# Allegro board LAY-97013_A2.brd
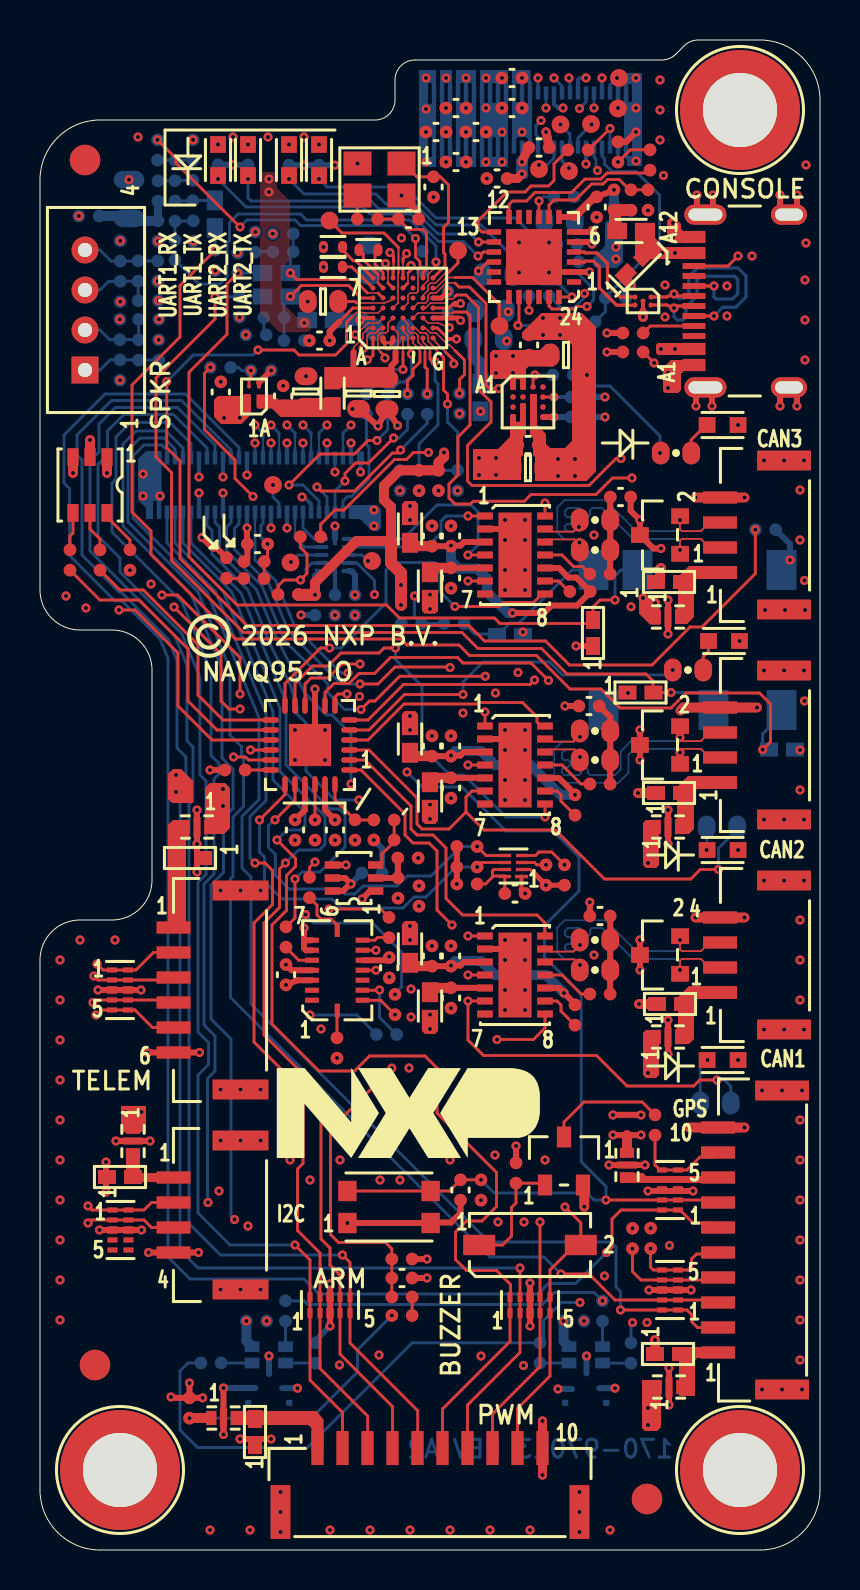
[diagram p0: board, top side]
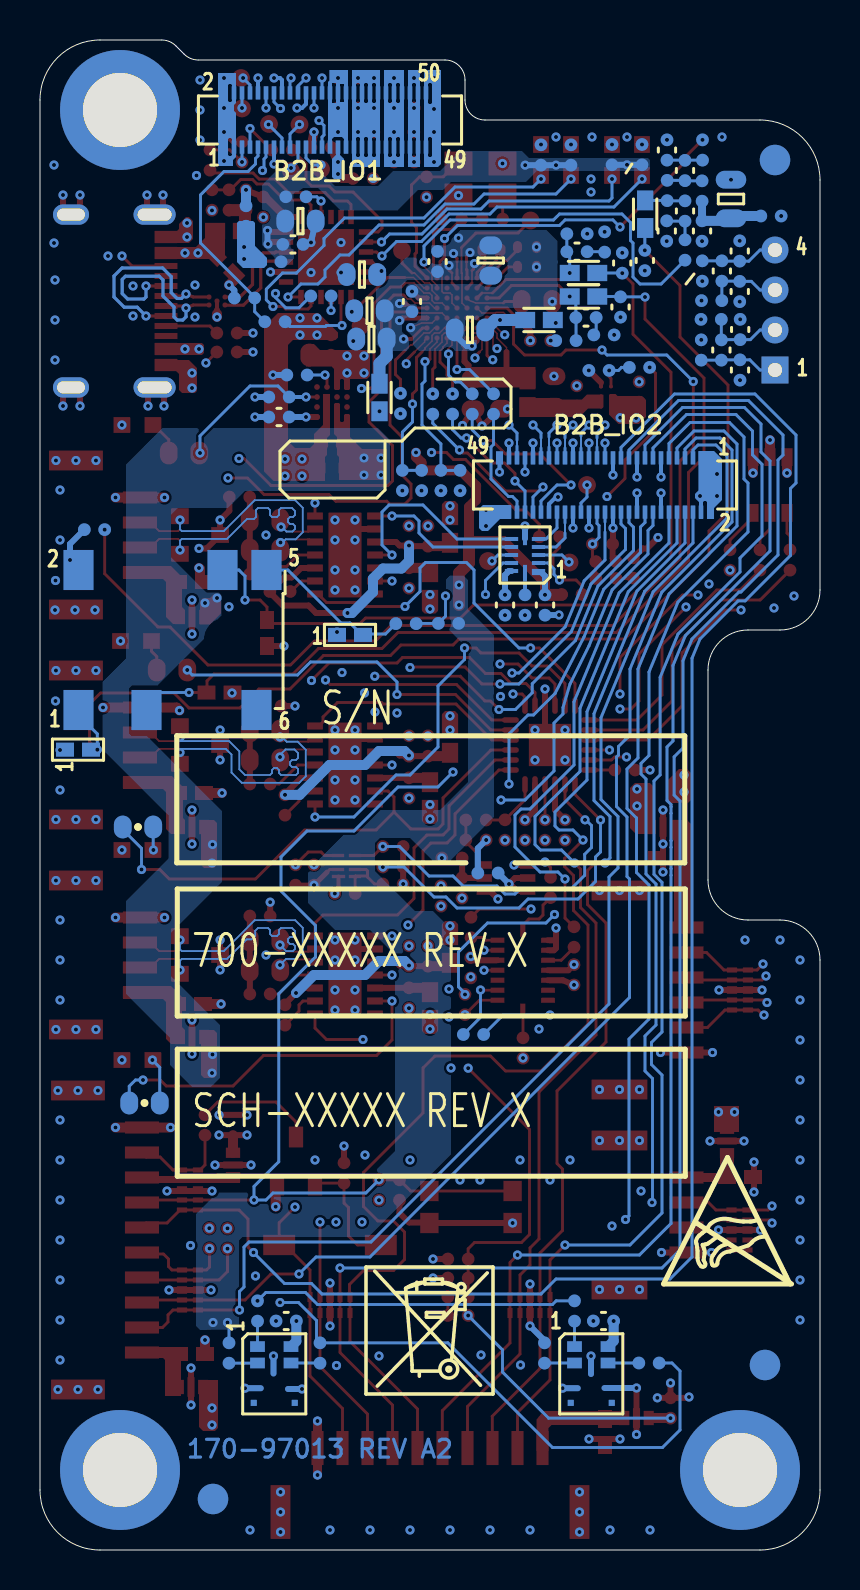
[diagram p1: board, bottom side, seen from below]

Outline 39 x 75.5 mm; copper layers: TOP, L2_GND1, L3_SIG1, L4_SIG2, L5_GND2, BOTTOM. Coordinates in mm from the lower left corner of the outline.
Outline path: 0,68.5 arc(0.88,70.62) 3,71.5 16.75,71.5 arc(17.46,71.79) 17.75,72.5 17.75,73.5 arc(18.04,74.21) 18.75,74.5 31.09,74.5 arc(31.47,74.58) 31.79,74.79 32.21,75.21 arc(32.53,75.42) 32.91,75.5 36,75.5 arc(38.12,74.62) 39,72.5 39,3 arc(38.12,0.88) 36,0 3,0 arc(0.88,0.88) 0,3 0,29.5 arc(0.59,30.91) 2,31.5 3.6,31.5 arc(5.01,32.09) 5.6,33.5 5.6,44 arc(5.01,45.41) 3.6,46 2,46 arc(0.59,46.59) 0,48 0,68.5

## Design rules (mm)
constraint set DEFAULT: min track width 0.145
net group CAN1_: nets CAN1_H CAN1_L
net group CAN2_: nets CAN2_H CAN2_L
net group CAN3_: nets CAN3_H CAN3_L
net group USB_CON_D: nets USB_CON_DM USB_CON_DP
net group USB_D: nets USB_DM USB_DP
net group CLK: nets CCM2_CLKO2_FLEXIO1_IO27 CCM_CLKO3_CAN3_TX CCM_CLKO4_CAN3_RX DEBUG_TCLK_SWCLK GPIO15_SPI8_SCK SAI2_TX_BCLK
net group I2C: nets I2C4_SCL I2C4_SDA I3C1_SCL I3C1_SDA I3C2A_SCL I3C2A_SDA
net group POWER: nets CON_CAN1_5V0 CON_CAN2_5V0 CON_CAN3_5V0 MICBIAS N20053822 N20058873 N20059703 N20163589 N20386625 N20387346 VBUS VDD_CAN1_3V3 VDD_CAN1_5V0 VDD_CAN2_3V3 VDD_CAN2_5V0 VDD_CAN3_3V3 VDD_CAN3_5V0 VDD_CON_GPS_3V3 VDD_CON_GPS_5V0 VDD_CON_I2C_5V0 VDD_CON_PWM VDD_CON_UART_5V0

## Placement (name value [footprint] x y rotation side)
BH1  MH3.7_6  [MH236-146P]  35 72 0 top
BH2  MH3.7_6  [MH236-146P]  4 4 0 top
BH3  MH3.7_6  [MH236-146P]  35 4 0 top
C1  0.1uF  [CC0402_25]  23.6 73.6 0 top
C2  0.1uF  [CC0402_25]  20.8 72.1 0 top
C3  0.1uF  [CC0402_25]  23.6 72.1 0 top
C4  0.1uF  [CC0402_25]  19.8 70.9 180 top
C5  1uF  [CC0402_25]  21.8 70.9 180 top
C6  1uF  [CC0402_25]  24.95 70.12 0 top
C7  1uF  [CC0402_25]  20.8 69.4 0 top
C8  0.1uF  [CC0402_25]  22.85 68.58 180 top
C9  10pF  [CC0402_25]  19.68 68.15 270 top
C10  1uF  [CC0402_25]  27.83 67.15 270 top
C11  10pF  [CC0402_25]  18.43 66.55 0 top
C12  2.2uF  [CC0402_TOL0P2_OV]  14.65 65.15 180 top
C13  2.2uF  [CC0402_TOL0P2_OV]  16.43 65 0 top
C14  2.2uF  [CC0402_TOL0P2_OV]  14.65 64.16 180 top
C15  4.7uF  [CC0603_OV]  14.15 62.42 180 top
C16  1uF  [CC0402_25]  13.97 60.47 180 top
C17  0.1uF  [CC0402_25]  24.45 60.25 90 top
C18  10uF  [CC0603_OV]  26.3 59.75 0 top
C19  4.7uF  [CC0603_OV]  13.3 57.92 90 top
C20  1uF  [CC0402_25]  9.04 57.9 90 top
C21  4.7uF  [CC0603_OV]  15.92 57.83 270 top
C22  4.7uF  [CC0603_OV]  17.35 57.8 270 top
C23  0.1uF  [CC0402_25]  12.16 57.7 90 top
C24  0.1uF  [CC0402_25]  24.4 55.25 0 top
C25  10uF  [CC0603_OV]  24.4 54.1 0 top
C26  4700pF  [CC0402_25]  29.02 52.65 0 top
C27  0.047uF  [CC0402_25]  19.6 50.7 90 top
C28  1uF  [CC0402_25]  20.55 50.7 90 top
C29  0.1uF  [CC0402_25]  10.88 50.3 180 top
C30  0.047uF  [CC0402_25]  20.55 48.6 270 top
C31  4700pF  [CC0402_25]  27.45 42.2 180 top
C32  0.047uF  [CC0402_25]  19.6 40.2 90 top
C33  1uF  [CC0402_25]  20.55 40.2 90 top
C34  0.047uF  [CC0402_25]  20.55 38.1 270 top
C35  0.1uF  [CC0402_25]  12.75 36 270 top
C36  0.1uF  [CC0402_25]  14.75 36 270 top
C37  0.1uF  [CC0402_25]  23.75 32.83 0 top
C38  4700pF  [CC0402_25]  28 31.7 180 top
C39  0.047uF  [CC0402_25]  19.6 29.7 90 top
C40  1uF  [CC0402_25]  20.55 29.7 90 top
C41  0.1uF  [CC0402_25]  17.46 29.11 270 top
C42  0.1uF  [CC0402_25]  12.3 28.76 90 top
C43  0.047uF  [CC0402_25]  20.55 27.6 270 top
C44  0.1uF  [CC0402_25]  21.02 18 90 top
C45  0.1uF  [CC0402_25]  18.1 13.6 0 top
C46  15pF  [CC0402_25]  7.65 70 90 bottom
C47  1uF  [CC0402_25]  6.75 68.97 270 bottom
C48  22uF  [CC0805_OV]  4.45 67.55 90 bottom
C49  1uF  [CC0402_25]  6.75 66.95 90 bottom
C50  4.7uF  [CC0603_OV]  25.98 66.44 180 bottom
C51  15pF  [CC0402_25]  7.66 65.95 90 bottom
C52  1uF  [CC0402_25]  5.9 65.95 270 bottom
C53  0.1uF  [CC0402_25]  26.35 65.28 180 bottom
C54  15pF  [CC0402_25]  4.01 64.95 270 bottom
C55  0.1uF  [CC0402_25]  12.15 64.91 180 bottom
C56  4.7uF  [CC0603_OV]  16.46 64.47 90 bottom
C57  15pF  [CC0402_25]  8.76 64.47 270 bottom
C58  0.1uF  [CC0402_25]  19.12 64.42 90 bottom
C59  220pF  [CC0402_25]  9.89 64.35 90 bottom
C60  15pF  [CC0402_25]  4.91 63.95 90 bottom
C61  4.7uF  [CC0603_OV]  22.9 63.77 0 bottom
C62  15pF  [CC0402_25]  4.01 62.92 270 bottom
C63  0.1uF  [CC0402_25]  20.4 62.42 90 bottom
C64  220pF  [CC0402_25]  9.97 62.15 270 bottom
C65  4.7uF  [CC0603_OV]  22.52 61.96 0 bottom
C66  0.1uF  [CC0402_25]  11.7 61.62 180 bottom
C67  15pF  [CC0402_25]  3.99 61.02 270 bottom
C68  4.7uF  [CC0603_OV]  17.5 61 0 bottom
C69  4.7uF  [CC0603_OV]  22.43 60.55 0 bottom
C70  15pF  [CC0402_25]  4.93 60 90 bottom
C71  15pF  [CC0402_25]  4 59 270 bottom
C72  1000pF  [CC0402_25]  27.05 56.65 0 bottom
C73  0.1uF  [CC0402_25]  15.75 47.25 270 bottom
C74  0.1uF  [CC0402_25]  13.75 47.25 270 bottom
C75  0.1uF  [CC0402_25]  26.69 11.45 0 bottom
C76  0.1uF  [CC0402_25]  10.82 11.45 0 bottom
D1  LED_AMB  [LED_0603]  8.9 69.5 270 top
D2  LED_GRN  [LED_0603]  10.4 69.5 270 top
D3  LED_AMB  [LED_0603]  12.45 69.5 270 top
D4  LED_GRN  [LED_0603]  13.95 69.5 270 top
D5  PESD0402  [0402_MLP#2]  29.75 64.25 45 top
D6  LED_SUPER_RED  [LED_0603]  34.13 56.25 0 top
D7  150352M173300  [LED6_0P85_3P25X2P85_SM]  2.5 53.25 270 top
D8  PESD0402  [0402_MLP]  31.45 48.4 0 top
D9  PESD0402  [0402_MLP]  27.65 45.85 90 top
D10  LED_GRN  [LED_0603]  34.2 45.45 0 top
D11  PESD0402  [0402_MLP]  30.02 42.87 0 top
D12  PESD0402  [0402_MLP]  31.45 37.85 0 top
D13  LED_GRN  [LED_0603]  34.13 35 0 top
D14  PESD0402  [0402_MLP]  7.5 34.6 180 top
D15  SZESD7104MUTAG  [UDFN10_2P5X1]  4 28 0 top
D16  PESD0402  [0402_MLP]  31.5 27.3 0 top
D17  LED_GRN  [LED_0603]  34.13 24.5 0 top
D18  PESD0402  [0402_MLP]  4 18.65 0 top
D19  SZESD7104MUTAG  [UDFN10_2P5X1]  31.5 18 180 top
D20  SZESD7104MUTAG  [UDFN10_2P5X1]  4.03 16 0 top
D21  SZESD7104MUTAG  [UDFN10_2P5X1]  31.5 13 180 top
D22  SZESD7104MUTAG  [UDFN10_2P5X1]  14.5 12.25 90 top
D23  SZESD7104MUTAG  [UDFN10_2P5X1]  24.5 12.25 90 top
D24  PESD0402  [0402_MLP]  31.4 9.8 0 top
D25  PESD0402  [0402_MLP]  10.75 5.9 90 top
D26  PESD0402  [0402_MLP]  23.5 45.75 180 bottom
D27  PESD0402  [0402_MLP]  37.1 40.02 180 bottom
FL1  0.1uF  [CC_FIL_0402]  31.4 46.65 0 top
FL2  0.1uF  [CC_FIL_0402]  7.85 36.15 180 top
FL3  0.1uF  [CC_FIL_0402]  31.4 36.15 0 top
FL4  0.1uF  [CC_FIL_0402]  31.4 25.65 0 top
FL5  0.1uF  [CC_FIL_0402]  4.65 20.45 270 top
FL6  0.1uF  [CC_FIL_0402]  29.35 19.25 270 top
FL7  0.1uF  [CC_FIL_0402]  31.45 8.15 0 top
FL8  0.1uF  [CC_FIL_0402]  9.18 6.6 0 top
J1  USB_TYPE_C  [CON16F_USB_TYPE-C_RA_SM]  36.3 62.45 90 top
J2  CON 1X4 PLUG  [CON_PH_4M_2MM_TH]  2.25 59 90 top
J3  CON_1X4  [CON_1X4_1P25_8P25X4P25_SM_RA]  36.25 50.75 90 top
J4  CON_1X4  [CON_1X4_1P25_8P25X4P25_SM_RA]  36.25 40.25 90 top
J5  CON_1X4  [CON_1X4_1P25_8P25X4P25_SM_RA]  36.25 29.75 90 top
J6  CON_1X6  [CON_1X6_1P25_10P75X4P25_SM]  9 28 90 top
J7  CON_1X4  [CON_1X4_1P25_8P25X4P25_SM]  9 16.75 90 top
J8  CON 1X10 SM  [CON10_1P25_15P75X4P05_SM]  35.75 15.5 90 top
J9  CON 1X10 SM  [CON10_1P25_15P75X4P05_SM]  19.5 3.25 0 top
J12  CONN AUDIO 6  [CON6P_JACK_SMT]  34.17 45.5 180 bottom
L1  120OHM@100MHZ  [IND_0603]  29.55 65.95 180 top
L2  120OHM@100MHZ  [IND_0603]  14.63 57.84 90 top
L3  BLM18KG121TZ1  [IND_0603]  18.5 51.05 270 top
L4  BLM18KG121TZ1  [IND_0603]  19.5 48.2 90 top
L5  BLM18KG121TZ1  [IND_0603]  18.5 40.55 270 top
L6  BLM18KG121TZ1  [IND_0603]  19.5 37.7 90 top
L7  BLM18KG121TZ1  [IND_0603]  18.5 30.05 270 top
L8  BLM18KG121TZ1  [IND_0603]  19.5 27.2 90 top
L9  120OHM@100MHZ  [IND_0603]  8.74 66.79 270 bottom
L10  120OHM@100MHZ  [IND_0603]  11.82 63.85 180 bottom
L11  120OHM@100MHZ  [IND_0603]  11.82 62.67 180 bottom
L12  120OHM@100MHZ  [IND_0603]  14.05 61.5 0 bottom
L13  120OHM@100MHZ  [IND_0603]  22.02 57.62 90 bottom
NOREF  -  []  38.3 25.6 0 top
NOREF#2  -  []  38.15 7.62 90 top
NOREF#3  -  []  6.68 17.38 90 top
NOREF#4  -  []  14.07 50.55 0 top
NOREF#5  -  []  25.25 47.8 90 top
NOREF#6  -  []  30.84 8.15 0 top
NOREF#7  -  []  11.85 19.6 0 top
NOREF#8  -  []  19.23 70.14 90 top
NOREF#9  -  []  25.25 28.75 90 top
NOREF#10  -  []  15.55 42.3 90 top
NOREF#11  -  []  25.15 56.65 90 top
NOREF#12  -  []  22.25 37.3 0 top
NOREF#13  -  []  4.29 21.06 90 top
NOREF#14  -  []  10.04 6.98 0 top
NOREF#15  -  []  34 48.88 90 top
NOREF#16  -  []  6.68 14.88 0 top
NOREF#17  -  []  10.03 23.02 90 top
NOREF#18  -  []  46.6 25.6 90 top
NOREF#19  -  []  13.6 30.49 0 top
NOREF#20  -  []  46.6 46.6 90 top
NOREF#21  -  []  11.15 22.6 0 top
NOREF#22  -  []  34 27.88 90 top
NOREF#23  -  []  16.02 51.9 90 top
NOREF#24  -  []  17.15 50.17 90 top
NOREF#25  -  []  37.86 4.9 0 top
NOREF#26  -  []  27.29 8.1 90 top
NOREF#27  -  [unnamed#2]  2.25 69.5 0 top
NOREF#28  -  []  37.2 26.02 90 top
NOREF#29  -  []  30.84 8.15 0 top
NOREF#30  -  []  33.77 59.56 90 top
NOREF#31  -  []  30.15 62.45 90 top
NOREF#32  -  []  16.45 65.5 90 top
NOREF#33  -  []  25.25 26.8 90 top
NOREF#34  -  []  34 40.88 90 top
NOREF#35  -  []  6.68 18.62 90 top
NOREF#36  -  []  8.57 6.6 0 top
NOREF#37  -  []  29.88 49 0 top
NOREF#38  -  []  14.18 65.15 0 top
NOREF#39  -  []  29.75 62.25 90 top
NOREF#40  -  []  15.25 64.51 0 top
NOREF#41  -  []  32.7 59.25 90 top
NOREF#42  -  []  38.3 46.6 0 top
NOREF#43  -  [unnamed#2]  2.75 9.25 0 top
NOREF#44  -  []  32.7 60.7 90 top
NOREF#45  -  []  19.53 16.35 90 top
NOREF#46  -  []  46.6 36.1 90 top
NOREF#47  -  []  21.96 15.25 0 top
NOREF#48  -  []  34 30.38 90 top
NOREF#49  -  []  19.23 70.14 0 top
NOREF#50  -  []  34 51.38 90 top
NOREF#51  -  []  16.41 31.29 90 top
NOREF#52  -  []  38.3 36.1 0 top
NOREF#53  -  []  25.25 37.3 90 top
NOREF#54  -  []  15.43 48.95 90 top
NOREF#55  -  []  39.33 42.25 90 top
NOREF#56  -  []  37.86 72.9 0 top
NOREF#57  -  []  29.54 62.86 0 top
NOREF#58  -  []  6.68 31.12 90 top
NOREF#59  -  []  23.25 34.73 0 top
NOREF#60  -  []  10.45 57.17 90 top
NOREF#61  -  []  13.85 50.8 0 top
NOREF#62  -  []  6.68 29.88 90 top
NOREF#63  -  []  8.45 45.67 0 top
NOREF#64  -  []  32.7 60.05 90 top
NOREF#65  -  []  37.2 36.52 90 top
NOREF#66  -  []  22.2 36.95 0 top
NOREF#67  -  []  25.3 36.95 90 top
NOREF#68  -  []  29.35 18.64 90 top
NOREF#69  -  []  7.24 36.15 0 top
NOREF#70  -  []  19.7 70.14 0 top
NOREF#71  -  []  27.02 48.75 0 top
NOREF#72  -  []  4.65 20.45 90 top
NOREF#73  -  []  26.45 9.35 0 top
NOREF#74  -  []  10.25 58.37 0 top
NOREF#75  -  []  34 38.38 90 top
NOREF#76  -  []  -72.88 -48.4 0 top
NOREF#77  -  []  30.79 46.29 90 top
NOREF#78  -  []  34 38.38 0 top
NOREF#79  -  []  21.95 22.6 90 top
NOREF#80  -  []  25.25 39.25 90 top
NOREF#81  -  []  14.25 42.23 0 top
NOREF#82  -  []  32.7 62.2 90 top
NOREF#83  -  []  23.65 56.65 0 top
NOREF#84  -  []  0.55 66.95 0 top
NOREF#85  -  []  25.3 26.45 90 top
NOREF#86  -  []  23.18 33.52 90 top
NOREF#87  -  []  6.68 24.88 0 top
NOREF#88  -  []  25.3 47.45 90 top
NOREF#89  -  []  11.44 8.1 90 top
NOREF#90  -  []  25.89 6.98 90 top
NOREF#91  -  []  11.62 -14.9 90 top
NOREF#92  -  []  30.9 70.47 0 top
NOREF#93  -  []  37.45 58.13 90 top
NOREF#94  -  []  23.18 34.88 0 top
NOREF#95  -  []  16.45 64.51 90 top
NOREF#96  -  []  11.81 33.99 90 top
NOREF#97  -  []  30.79 25.29 90 top
NOREF#98  -  []  32.7 61.2 90 top
NOREF#99  -  []  11.44 7.44 0 top
NOREF#100  -  []  27.29 7.44 0 top
NOREF#101  -  []  15.47 18.68 0 top
NOREF#102  -  []  1.65 51.85 0 top
NOREF#103  -  []  4.65 19.84 90 top
NOREF#104  -  []  37.2 47.02 90 top
NOREF#105  -  []  34 52.62 90 top
NOREF#106  -  []  43.7 70.47 90 top
NOREF#107  -  []  15.82 64.65 0 top
NOREF#108  -  []  14.86 26.98 90 top
NOREF#109  -  []  30.84 7.79 90 top
NOREF#110  -  []  10.25 56.98 90 top
NOREF#111  -  []  15.43 48.95 90 top
NOREF#112  -  []  5.47 54.6 0 top
NOREF#113  -  []  21.65 16.65 0 top
NOREF#114  -  [unnamed#2]  30.35 2.55 0 top
NOREF#115  -  []  6.86 4.9 0 top
NOREF#116  -  []  34 27.88 0 top
NOREF#117  -  []  15.37 17.95 0 top
NOREF#118  -  []  30.79 46.65 0 top
NOREF#119  -  []  26.45 9.35 90 top
NOREF#120  -  []  27.68 49 0 top
NOREF#121  -  []  1.08 51.62 90 top
NOREF#122  -  []  6.35 54.6 0 top
NOREF#123  -  []  34 42.12 90 top
NOREF#124  -  []  27.35 13.85 90 top
NOREF#125  -  []  29.54 62.86 90 top
NOREF#126  -  []  6.68 14.88 90 top
NOREF#127  -  []  22.25 47.8 0 top
NOREF#128  -  []  2.25 65 90 top
NOREF#129  -  []  19.43 15.62 90 top
NOREF#130  -  []  1.65 51.85 90 top
NOREF#131  -  []  15.55 38.2 0 top
NOREF#132  -  []  23.25 34.38 90 top
NOREF#133  -  []  14.18 64.16 0 top
NOREF#134  -  []  28.5 70.14 0 top
NOREF#135  -  []  13.6 30.49 0 top
NOREF#136  -  []  10.03 13.03 90 top
NOREF#137  -  []  4 4 0 top
NOREF#138  -  []  10.45 58.17 0 top
NOREF#139  -  []  28.32 48.75 0 top
NOREF#140  -  []  33.27 58.13 90 top
NOREF#141  -  []  2.25 59 90 top
NOREF#142  -  []  8.57 6.6 0 top
NOREF#143  -  []  19.45 12.6 90 top
NOREF#144  -  []  12.25 42.23 0 top
NOREF#145  -  []  6.68 24.88 90 top
NOREF#146  -  []  40.17 57.88 0 top
NOREF#147  -  []  5.05 57.05 90 top
NOREF#148  -  []  8.46 36.51 90 top
NOREF#149  -  []  33.27 66.77 0 top
NOREF#150  -  []  5.95 54.6 0 top
NOREF#151  -  []  15.95 65 0 top
NOREF#152  -  []  37.1 8.03 90 top
NOREF#153  -  []  7.85 36.15 0 top
NOREF#154  -  []  17.02 64.65 90 top
NOREF#155  -  []  25.25 49.75 90 top
NOREF#156  -  []  13.6 27.49 90 top
NOREF#157  -  []  4.35 50.17 0 top
NOREF#158  -  []  26.26 7.36 90 top
NOREF#159  -  []  25.15 56.65 90 top
NOREF#160  -  []  12.03 1.9 0 top
NOREF#161  -  []  11.62 0.85 0 top
NOREF#162  -  []  10.6 9.35 0 top
NOREF#163  -  []  34 31.62 90 top
NOREF#164  -  []  28.99 19.86 90 top
NOREF#165  -  []  22.2 47.45 0 top
NOREF#166  -  []  30.79 35.79 90 top
NOREF#167  -  []  38.15 7.62 0 top
NOREF#168  -  []  10.6 9.35 90 top
NOREF#169  -  []  34 48.88 0 top
NOREF#170  -  []  30.79 25.65 0 top
NOREF#171  -  []  10.41 7.36 90 top
NOREF#172  -  []  25.52 56.28 90 top
NOREF#173  -  []  23.25 33.67 0 top
NOREF#174  -  []  32.7 65.65 90 top
NOREF#175  -  []  10.04 6.98 90 top
NOREF#176  -  []  33.9 9.88 90 top
NOREF#177  -  []  8.57 6.24 90 top
NOREF#178  -  []  15.25 65.5 0 top
NOREF#179  -  []  15.65 48.7 90 top
NOREF#180  -  []  22.2 26.45 0 top
NOREF#181  -  []  25.89 6.98 0 top
NOREF#182  -  []  23.65 56.65 0 top
NOREF#183  -  []  32.7 61.7 90 top
NOREF#184  -  []  33.77 65.34 90 top
NOREF#185  -  []  29.35 19.25 90 top
NOREF#186  -  []  30.79 25.65 0 top
NOREF#187  -  []  30.79 36.15 0 top
NOREF#188  -  []  -494.52 -243.34 0 top
NOREF#189  -  []  30.79 36.15 0 top
NOREF#190  -  []  49.31 57.88 90 top
NOREF#191  -  []  23.29 56.28 0 top
NOREF#192  -  []  13.88 5.1 0 top
NOREF#193  -  []  30.79 46.65 0 top
NOREF#194  -  []  14.75 38.27 90 top
NOREF#195  -  []  22.25 26.8 0 top
NOREF#196  -  []  1.08 51.62 0 top
NOREF#197  -  []  11.15 12.6 0 top
NOREF#198  -  [unnamed#2]  2.75 9.25 180 bottom
NOREF#199  -  [unnamed#2]  30.35 2.55 180 bottom
NOREF#200  -  []  22.7 7.8 180 bottom
NOREF#201  -  []  32.14 18.69 180 bottom
NOREF#202  -  []  32.16 34.36 180 bottom
NOREF#203  -  []  32.45 46.7 180 bottom
NOREF#204  -  []  32.14 26.7 180 bottom
NOREF#205  -  [unnamed#2]  2.25 69.5 180 bottom
P3  CON 2X25  [CON_RCPT_2X25_0P4MM_SM]  24.5 71.5 180 bottom
P4  CON 2X25  [CON_RCPT_2X25_0P4MM_SM]  10.75 53.25 0 bottom
Q1  NX3020NAKS  [SOT-363_0P65_SMT]  15.7 33.6 180 top
Q2  AO3400A  [SOT-23W]  26.2 19.45 0 top
R1  0 OHM  [RC0402_25]  26.9 70 0 top
R2  100k  [RC0402_25]  28.9 69.9 90 top
R3  0 OHM  [RC0402_25]  30.5 69.5 90 top
R4  0 OHM  [RC0402_25]  28.7 67.5 90 top
R5  24K  [RC0402_25]  29.55 67.5 90 top
R6  47K  [RC0402_25]  30.4 67.5 270 top
R7  0 OHM  [RC0402_25]  16.38 66.55 0 top
R8  5.1K  [RC0402_25]  29.65 60.85 180 top
R9  5.1K  [RC0402_25]  29.65 59.9 180 top
R10  390  [RC0603_OV]  31.8 54.85 0 top
R11  10K  [RC0402_25]  18.95 53.48 270 top
R12  10K  [RC0402_25]  19.93 53.48 270 top
R13  60.4  [RC0603_OV]  27.75 51.5 0 top
R14  0 OHM  [RC0402_25]  13.53 50.66 180 top
R15  60.4  [RC0603_OV]  27.75 50 0 top
R16  1.5K  [RC0402_25]  1.5 49.5 90 top
R17  1.5K  [RC0402_25]  3 49.5 90 top
R18  1.5K  [RC0402_25]  4.5 49.5 90 top
R19  1K  [RC0402_25]  10.71 49.42 180 top
R20  0 OHM  [RC0402_25]  9.32 49.1 270 top
R21  0 OHM  [RC0402_25]  28 48.8 0 top
R22  1K  [RC0402_25]  10.7 48.58 0 top
R23  10K  [RC0402_25]  27 47.92 180 top
R24  10K  [RC0402_25]  12.41 47.77 180 top
R25  390  [RC0603_OV]  32.4 44 0 top
R26  60.4  [RC0603_OV]  27.75 40.95 0 top
R27  60.4  [RC0603_OV]  27.75 39.5 0 top
R28  0 OHM  [RC0402_25]  9.75 39 180 top
R29  0 OHM  [RC0402_25]  28 38.3 0 top
R30  10K  [RC0402_25]  26.75 37.25 270 top
R31  0 OHM  [RC0402_25]  17.2 36.5 180 top
R32  10K  [RC0402_25]  13.75 36 90 top
R33  10K  [RC0402_25]  15.75 36 90 top
R34  10K  [RC0402_25]  17.2 35.5 0 top
R35  10K  [RC0402_25]  21.35 35.17 0 top
R36  0 OHM  [RC0402_25]  18.4 34.6 180 top
R37  10K  [RC0402_25]  21.35 34.15 0 top
R38  2.2K  [RC0402_25]  25.3 33.75 90 top
R39  2.2K  [RC0402_25]  26.23 33.75 90 top
R40  200K  [RC0402_25]  21.35 33.3 0 top
R41  0 OHM  [RC0402_25]  13.47 33.12 270 top
R42  10K  [RC0402_25]  17.9 33.1 270 top
R43  0 OHM  [RC0402_25]  18.95 32.7 90 top
R44  0 OHM  [RC0402_25]  17.45 31.12 270 top
R45  0 OHM  [RC0402_25]  12.3 30.65 270 top
R46  60.4  [RC0603_OV]  27.75 30.5 0 top
R47  60.4  [RC0603_OV]  27.75 29 0 top
R48  0 OHM  [RC0402_25]  28 27.8 0 top
R49  0 OHM  [RC0402_25]  17.75 27.27 90 top
R50  10K  [RC0402_25]  26.75 26.75 270 top
R51  0 OHM  [RC0402_25]  14.85 25.1 270 top
R52  0 OHM  [RC0402_25]  30.75 21.25 270 top
R53  10K  [RC0402_25]  23.8 18.85 90 top
R54  10K  [RC0402_25]  22.05 18 270 top
R55  2.2K  [RC0402_25]  30.53 15.58 270 top
R56  2.2K  [RC0402_25]  29.62 15.57 270 top
R57  1K  [RC0402_25]  18.1 14.55 0 top
R58  6.98K  [RC0402_25]  18.1 12.65 180 top
R59  0 OHM  [RC0402_25]  18.1 11.72 180 top
R60  0 OHM  [RC0402_25]  7.47 7.1 270 top
R61  0 OHM  [RC0402_25]  5.88 70 270 bottom
R62  680  [RC0402_25]  10.4 69.77 90 bottom
R63  680  [RC0402_25]  8.9 69.77 90 bottom
R64  680  [RC0402_25]  13.95 69.75 90 bottom
R65  680  [RC0402_25]  12.45 69.75 90 bottom
R66  1.0K  [RC0402_25]  7.64 67.97 270 bottom
R67  1.0K  [RC0402_25]  5.9 67.95 90 bottom
R68  10K  [RC0402_25]  26.2 67.66 180 bottom
R69  0 OHM  [RC0402_25]  28.7 66.7 90 bottom
R70  0 OHM  [RC0402_25]  2.45 66.7 0 bottom
R71  10K  [RC0402_25]  12.15 65.81 180 bottom
R72  20  [RC0402_25]  10.77 65.4 90 bottom
R73  0 OHM  [RC0402_25]  6.75 65 90 bottom
R74  0 OHM  [RC0402_25]  27.45 64.41 180 bottom
R75  0 OHM  [RC0402_25]  5.89 63.95 90 bottom
R76  0 OHM  [RC0402_25]  24.95 62.7 0 bottom
R77  100k  [RC0402_25]  28.77 62.6 0 bottom
R78  0 OHM  [RC0402_25]  5.42 62.47 180 bottom
R79  0 OHM  [RC0402_25]  5.44 61.53 180 bottom
R80  0 OHM  [RC0402_25]  27.25 61.41 0 bottom
R81  20  [RC0402_25]  10.8 60.76 180 bottom
R82  10K  [RC0402_25]  12.71 60.47 0 bottom
R83  0 OHM  [RC0402_25]  5.94 60 270 bottom
R84  0 OHM  [RC0402_25]  9.03 59.13 0 bottom
R85  10K  [RC0402_25]  11.05 58.98 0 bottom
R86  51K  [RC0402_25]  26.15 58.75 0 bottom
R87  10K  [RC0402_25]  27.05 57.65 0 bottom
R88  0 OHM  [RC0402_25]  20.98 57.33 90 bottom
R89  0 OHM  [RC0402_25]  19.36 57.3 90 bottom
R90  0 OHM  [RC0402_25]  18.37 57.3 90 bottom
R91  0 OHM  [RC0402_25]  17.39 57.3 90 bottom
R92  0 OHM  [RC0402_25]  16.32 57.3 90 bottom
R93  0 OHM  [RC0402_25]  20.88 53.48 90 bottom
R94  0 OHM  [RC0402_25]  19.92 53.48 90 bottom
R95  0 OHM  [RC0402_25]  18.95 53.48 90 bottom
R96  0 OHM  [RC0402_25]  18 53.48 90 bottom
R97  0 OHM  [RC0402_25]  36.27 51.02 180 bottom
R98  10K  [RC0402_25]  14.75 47.25 270 bottom
R99  100k  [RC0402_25]  18.57 46.33 0 bottom
R100  0 OHM  [RC0402_25]  20.7 46.32 0 bottom
R101  390  [RC0603_OV]  34.1 36.15 180 bottom
R102  10K  [RC0402_25]  16.6 33.85 180 bottom
R103  0 OHM  [RC0402_25]  17.32 25.77 0 bottom
R104  390  [RC0603_OV]  33.77 22.35 180 bottom
R105  0 OHM  [RC0402_25]  28.12 11.95 90 bottom
R106  0 OHM  [RC0402_25]  12.28 11.95 90 bottom
R107  0 OHM  [RC0402_25]  29.55 9.85 270 bottom
R108  0 OHM  [RC0402_25]  25 9.85 90 bottom
R109  0 OHM  [RC0402_25]  13.78 9.85 90 bottom
R110  0 OHM  [RC0402_25]  8.55 9.35 180 bottom
S1  CHS-01TA1  [SW_2P8X5P7_SM]  24.5 15.25 90 top
SW1  TL6330AF200Q  [SW4_SPST_4P6X2P8_SM]  17.45 17.15 0 top
TP1  TP_35MIL  [TESTPOINT_35MIL]  28.95 73.6 90 top
TP2  TP_35MIL  [TESTPOINT_35MIL]  28.9 72.08 90 top
TP3  TP_35MIL  [TESTPOINT_35MIL]  27.55 71.3 90 top
TP4  TP_35MIL  [TESTPOINT_35MIL]  26.02 71.28 90 top
TP5  TP_35MIL  [TESTPOINT_35MIL]  24.95 69.05 90 top
TP6  TP_35MIL  [TESTPOINT_35MIL]  26.45 68.95 90 top
TP7  TP_35MIL  [TESTPOINT_35MIL]  14.47 66.47 90 top
TP8  TP_35MIL  [TESTPOINT_35MIL]  20.9 64.97 90 top
TP9  TP_35MIL  [TESTPOINT_35MIL]  22.98 61.2 90 top
TP10  TP_35MIL  [TESTPOINT_35MIL]  11.65 53.25 90 top
TP11  TP_35MIL  [TESTPOINT_35MIL]  16.6 49.45 270 top
TP12  TP_35MIL  [TESTPOINT_35MIL]  12.53 49.38 270 top
U1  CP2105  [QFN24_0P5_4X4_EP]  24.7 64.65 180 top
U2  PCMF1USB3S  [WLCSP5_0P4_0P82X1P22]  30.15 62.45 270 top
U3  WM8962BECSN/R  [BGA49_0P5_3P62X4]  18.15 62.1 90 top
U4  NX5P2924DUK  [WLCSP6_0P5_0P89X1P39]  10.7 57.67 180 top
U5  NX5P3363UKZ  [BGA16_0P5_2P23X2P23]  24.4 57.4 0 top
U6  PESD2CANFD24L-TR  [SOT23_A]  31 50.75 90 top
U7  TJA1463ATK  [HVSON14_0P65_4P6X3P1_EP]  23.75 49.75 0 top
U8  PCAL6416AHF  [QFN24_4X4_EP2P1MM]  13.5 40.25 90 top
U9  PESD2CANFD24L-TR  [SOT23_A]  31 40.25 90 top
U10  TJA1463ATK  [HVSON14_0P65_4P6X3P1_EP]  23.75 39.25 0 top
U11  PCA9306JK  [X2SON8_0P35_1X1P35MM]  23.68 34.2 180 top
U12  PESD2CANFD24L-TR  [SOT23_A]  31 29.75 90 top
U13  BMI088  [LGA16_0P5_3X4P5MM]  14.86 28.99 180 top
U14  TJA1463ATK  [HVSON14_0P65_4P6X3P1_EP]  23.75 28.75 0 top
U15  74AVC4T3144GU12-QX  [XQFN12_0P4_1P8X2P1]  14.75 49.75 0 bottom
U16  MMICT5837-00-012  [LGA7_0P82_3P65X2P8]  27.29 8.81 180 bottom
U17  MMICT5837-00-012  [LGA7_0P82_3P65X2P8]  11.44 8.81 180 bottom
Y1  24MHz  [XTLOSC4_3P2X2P5MM_SM]  16.98 68.53 180 top

## Library data of the parts
BH1-BH3 = MOUNT_HOLE
C1-C14 C16-C76 = CAP_NP
C15 = CAP_NP: tolerance: 10%
D1-D4 D6 D10 D13 D17 = LED
D5 D8 D9 D11 D12 D14 D16 D18 D24-D27 = DIODE_TVS_BIDIR
D7 = LED_RGB_6P
D15 D19-D23 = ESD7104M
FL1-FL8 = EMIFILTER_NFM21P
J1 = USB2X8_TYPEC_4SH
J2 = CONN_HDR_4X1
J3-J5 J7 = CONN_1x4_SHLD
J6 = CONN_1x6_SHLD
J8 J9 = CON_HDR_1X10_2SH
J12 = CON6P_JACK
L1 L2 L9-L13 = BEAD_0
L3-L8 = IND_FERRITE
P3 P4 = HDR_2X25_4S
Q1 = TRAN_DUAL_NMOS_BSS138
Q2 = MOSFET_N
R1-R110 = RES
S1 = SW-SPST
SW1 = SW_PB_ESW
TP1-TP12 = T POINT R: Tolerance: TOLERANCE; User Part Number: 510-75618
U1 = CP2105_QFN24P
U2 = PESD1USB30_5P_A
U3 = WM8962_BGA_49P_A
U4 = NX5P2924DUK_WLCSP6
U5 = NX5P3290_16P
U6 U9 U12 = ESD_DIODE_2LINE
U7 U10 U14 = TJA1043ATK_14P_EP
U8 = PCAL6416AHF_QFN24
U11 = PCA9306_TSSOP8
U13 = BMI088_16P
U15 = 74AVC4T3144_12P
U16 U17 = T5837_LGA7
Y1 = XTAL_13

## Footprints (pads in the part's own frame, mm; a bottom-side part is the same pattern mirrored in y, then rotated)
0402_MLP
  rect 0.9x0.7 smd: 1(-0.65,0) 2(0.65,0)
0402_MLP#2
  rect 0.9x0.7 smd: 1(-0.65,0) 2(0.65,0)
BGA16_0P5_2P23X2P23
  round 0.28 smd: A1(-0.75,0.75) A2(-0.25,0.75) A3(0.25,0.75) A4(0.75,0.75) B1(-0.75,0.25) B2(-0.25,0.25) B3(0.25,0.25) B4(0.75,0.25) C1(-0.75,-0.25) C2(-0.25,-0.25) C3(0.25,-0.25) C4(0.75,-0.25) D1(-0.75,-0.75) D2(-0.25,-0.75) D3(0.25,-0.75) D4(0.75,-0.75)
BGA49_0P5_3P62X4
  round 0.254 smd: A1(-1.5,1.5) A2(-1,1.5) A3(-0.5,1.5) A4(0,1.5) A5(0.5,1.5) A6(1,1.5) A7(1.5,1.5) B1(-1.5,1) B2(-1,1) B3(-0.5,1) B4(0,1) B5(0.5,1) B6(1,1) B7(1.5,1) C1(-1.5,0.5) C2(-1,0.5) C3(-0.5,0.5) C4(0,0.5) C5(0.5,0.5) C6(1,0.5) C7(1.5,0.5) D1(-1.5,0) D2(-1,0) D3(-0.5,0) D4(0,0) D5(0.5,0) D6(1,0) D7(1.5,0) E1(-1.5,-0.5) E2(-1,-0.5) E3(-0.5,-0.5) E4(0,-0.5) E5(0.5,-0.5) E6(1,-0.5) E7(1.5,-0.5) F1(-1.5,-1) F2(-1,-1) F3(-0.5,-1) F4(0,-1) F5(0.5,-1) F6(1,-1) F7(1.5,-1) G1(-1.5,-1.5) G2(-1,-1.5) G3(-0.5,-1.5) G4(0,-1.5) G5(0.5,-1.5) G6(1,-1.5) G7(1.5,-1.5)
CC0402_25
  round 0.635 smd: 1(-0.508,0) 2(0.508,0)
CC0402_TOL0P2_OV
  oval 0.457x0.61 smd: 1(-0.475,0) 2(0.475,0)
CC0603_OV
  oval 0.889x1.143 smd: 1(-0.762,0) 2(0.762,0)
CC0805_OV
  oval 0.889x1.524 smd: 1(-0.965,0) 2(0.965,0)
CC_FIL_0402
  rect 0.508x0.711 smd: 1(-0.61,0) 3(0.61,0)
  rect 0.356x0.991 smd: 2(0,0)
CON6P_JACK_SMT
  round 0 hole 1.499 unplated: (-2.5,0) (4.5,0)
  rect 1.499x2.007 smd: 1(-2.9,-3.5) 2(-2.9,3.5) 3(0.5,-3.5) 4(4.3,3.5) 5(6.5,3.5) 6(6,-3.5)
CON10_1P25_15P75X4P05_SM
  rect 0.61x1.702 smd: 1(-5.625,1.848) 2(-4.375,1.848) 3(-3.125,1.848) 4(-1.875,1.848) 5(-0.625,1.848) 6(0.625,1.848) 7(1.875,1.848) 8(3.125,1.848) 9(4.375,1.848) 10(5.625,1.848)
  rect 0.991x2.692 smd: S1(-7.475,-1.352) S2(7.475,-1.352)
CON16F_USB_TYPE-C_RA_SM
  round 0 hole 0.65 unplated: (-2.89,2.53) (2.89,2.53)
  rect 0.61x1.143 smd: A1B12(-3.2,3.6) A4B9(-2.4,3.6) B1A12(3.2,3.6) B4A9(2.4,3.6)
  rect 0.305x1.143 smd: A5(-1.25,3.6) A6(-0.25,3.6) A7(0.25,3.6) A8(1.25,3.6) B5(1.75,3.6) B6(0.75,3.6) B7(-0.75,3.6) B8(-1.75,3.6)
  oval 1.016x1.803 hole 0.61x1.397: SH1(-4.32,-1.15) SH2(4.32,-1.15)
  oval 1.016x2.108 hole 0.61x1.702: SH3(-4.32,3.03) SH4(4.32,3.03)
CON_1X4_1P25_8P25X4P25_SM
  rect 0.61x1.702 smd: 1(1.875,2.322) 2(0.625,2.322) 3(-0.625,2.322) 4(-1.875,2.322)
  rect 0.991x2.794 smd: SH1(-3.725,-1.028) SH2(3.725,-1.028)
CON_1X4_1P25_8P25X4P25_SM_RA
  rect 0.61x1.702 smd: 1(-1.875,2.247) 2(-0.625,2.247) 3(0.625,2.247) 4(1.875,2.247)
  rect 0.991x2.692 smd: SH1(-3.725,-0.953) SH2(3.725,-0.953)
CON_1X6_1P25_10P75X4P25_SM
  rect 0.61x1.702 smd: 1(3.125,2.322) 2(1.875,2.322) 3(0.625,2.322) 4(-0.625,2.322) 5(-1.875,2.322) 6(-3.125,2.322)
  rect 0.991x2.794 smd: SH1(-4.975,-1.028) SH2(4.975,-1.028)
CON_PH_4M_2MM_TH
  rect 1.346x1.346 hole 0.711: 1(0,0)
  round 1.346 hole 0.711: 2(2,0) 3(4,0) 4(6,0)
CON_RCPT_2X25_0P4MM_SM
  rect 0.229x0.66 smd: 1(-4.8,-1.355) 2(-4.8,1.355) 3(-4.4,-1.355) 4(-4.4,1.355) 5(-4,-1.355) 6(-4,1.355) 7(-3.6,-1.355) 8(-3.6,1.355) 9(-3.2,-1.355) 10(-3.2,1.355) 11(-2.8,-1.355) 12(-2.8,1.355) 13(-2.4,-1.355) 14(-2.4,1.355) 15(-2,-1.355) 16(-2,1.355) 17(-1.6,-1.355) 18(-1.6,1.355) 19(-1.2,-1.355) 20(-1.2,1.355) 21(-0.8,-1.355) 22(-0.8,1.355) 23(-0.4,-1.355) 24(-0.4,1.355) 25(0,-1.355) 26(0,1.355) 27(0.4,-1.355) 28(0.4,1.355) 29(0.8,-1.355) 30(0.8,1.355) 31(1.2,-1.355) 32(1.2,1.355) 33(1.6,-1.355) 34(1.6,1.355) 35(2,-1.355) 36(2,1.355) 37(2.4,-1.355) 38(2.4,1.355) 39(2.8,-1.355) 40(2.8,1.355) 41(3.2,-1.355) 42(3.2,1.355) 43(3.6,-1.355) 44(3.6,1.355) 45(4,-1.355) 46(4,1.355) 47(4.4,-1.355) 48(4.4,1.355) 49(4.8,-1.355) 50(4.8,1.355)
  rect 0.356x0.66 smd: SH1(-5.275,1.355) SH2(-5.275,-1.355) SH3(5.275,-1.355) SH4(5.275,1.355)
HVSON14_0P65_4P6X3P1_EP
  rect 0.787x0.356 smd: 1(-1.5,1.95) 2(-1.5,1.3) 3(-1.5,0.65) 4(-1.5,0) 5(-1.5,-0.65) 6(-1.5,-1.3) 7(-1.5,-1.95) 8(1.5,-1.95) 9(1.5,-1.3) 10(1.5,-0.65) 11(1.5,0) 12(1.5,0.65) 13(1.5,1.3) 14(1.5,1.95)
  rect 1.651x4.242 smd: 15(0,0)
IND_0603
  rect 0.991x0.813 smd: 1(-0.69,0) 2(0.69,0)
LED6_0P85_3P25X2P85_SM
  rect 0.889x0.559 smd: 1(-1.395,0.85) 2(1.395,0.85) 3(-1.395,0) 4(1.395,0) 5(-1.395,-0.85) 6(1.395,-0.85)
LED_0603
  rect 0.838x0.787 smd: A(-0.775,0) C(0.775,0)
LGA7_0P82_3P65X2P8
  round 0 hole 0.66 unplated: (0,-0.71)
  rect 0.737x0.533 smd: 1(-0.838,1.362) 2(-0.838,0.542) 6(0.838,0.542) 7(0.838,1.362)
  round 0 smd: 3(0,-1.373)
  rect 0.305x0.305 smd: 4(-1.025,-1.45) 5(1.025,-1.45)
LGA16_0P5_3X4P5MM
  rect 0.686x0.254 smd: 1(1.262,1.5) 2(1.262,1) 3(1.262,0.5) 4(1.262,0) 5(1.262,-0.5) 6(1.262,-1) 7(1.262,-1.5) 9(-1.262,-1.5) 10(-1.262,-1) 11(-1.262,-0.5) 12(-1.262,0) 13(-1.262,0.5) 14(-1.262,1) 15(-1.262,1.5)
  rect 0.254x0.686 smd: 8(0,-2.013) 16(0,2.013)
MH236-146P
  round 5.994 hole 3.708: 1(0,0)
QFN24_0P5_4X4_EP
  rect 0.711x0.279 smd: 1(-2,1.25) 2(-2,0.75) 3(-2,0.25) 4(-2,-0.25) 5(-2,-0.75) 6(-2,-1.25) 13(2,-1.25) 14(2,-0.75) 15(2,-0.25) 16(2,0.25) 17(2,0.75) 18(2,1.25)
  rect 0.279x0.711 smd: 7(-1.25,-2) 8(-0.75,-2) 9(-0.25,-2) 10(0.25,-2) 11(0.75,-2) 12(1.25,-2) 19(1.25,2) 20(0.75,2) 21(0.25,2) 22(-0.25,2) 23(-0.75,2) 24(-1.25,2)
  rect 2.794x2.794 smd: 25(0,0)
QFN24_4X4_EP2P1MM
  oval 0.279x0.838 smd: 1(-1.25,-1.975) 2(-0.75,-1.975) 3(-0.25,-1.975) 4(0.25,-1.975) 5(0.75,-1.975) 6(1.25,-1.975) 13(1.25,1.975) 14(0.75,1.975) 15(0.25,1.975) 16(-0.25,1.975) 17(-0.75,1.975) 18(-1.25,1.975)
  oval 0.838x0.279 smd: 7(1.975,-1.25) 8(1.975,-0.75) 9(1.975,-0.25) 10(1.975,0.25) 11(1.975,0.75) 12(1.975,1.25) 19(-1.975,1.25) 20(-1.975,0.75) 21(-1.975,0.25) 22(-1.975,-0.25) 23(-1.975,-0.75) 24(-1.975,-1.25)
  rect 2.108x2.108 smd: 25(0,0)
RC0402_25
  round 0.635 smd: 1(-0.508,0) 2(0.508,0)
RC0603_OV
  oval 0.889x1.143 smd: 1(-0.762,0) 2(0.762,0)
SOT23_A
  rect 0.787x0.889 smd: 1(-0.94,-1.003) 2(0.94,-1.003) 3(0,1.003)
SOT-23W
  rect 0.711x1.041 smd: 1(-0.95,-1.2) 2(0.95,-1.2) 3(0,1.2)
SOT-363_0P65_SMT
  rect 0.762x0.381 smd: 1(-1.085,0.65) 2(-1.085,0) 3(-1.085,-0.65) 4(1.085,-0.65) 5(1.085,0) 6(1.085,0.65)
SW4_SPST_4P6X2P8_SM
  rect 0.914x1.016 smd: 1(-2.08,-0.8) 2(2.08,-0.8) 3(-2.08,0.8) 4(2.08,0.8)
SW_2P8X5P7_SM
  rect 1.016x1.6 smd: 1(0,2.54) 2(0,-2.54)
TESTPOINT_35MIL
  round 0.889 smd: 1(0,0)
UDFN10_2P5X1
  rect 0.508x0.254 smd: 1(-0.4,1) 2(-0.4,0.5) 4(-0.4,-0.5) 5(-0.4,-1) 6(0.4,-1) 7(0.4,-0.5) 9(0.4,0.5) 10(0.4,1)
  rect 0.508x0.381 smd: 3(-0.4,0) 8(0.4,0)
unnamed#2
  round 1.524 smd: (0,0)
WLCSP5_0P4_0P82X1P22
  round 0.254 smd: A1(-0.2,0.4) A2(0.2,0.4) B1(0,0) C1(-0.2,-0.4) C2(0.2,-0.4)
WLCSP6_0P5_0P89X1P39
  round 0.2 smd: A1(-0.25,0.5) A2(0.25,0.5) B1(-0.25,0) B2(0.25,0) C1(-0.25,-0.5) C2(0.25,-0.5)
X2SON8_0P35_1X1P35MM
  rect 0.66x0.17 smd: 1(-0.4,0.525)
  rect 0.61x0.17 smd: 2(-0.425,0.175) 3(-0.425,-0.175) 4(-0.425,-0.525) 5(0.425,-0.525) 6(0.425,-0.175) 7(0.425,0.175) 8(0.425,0.525)
XQFN12_0P4_1P8X2P1
  rect 0.66x0.305 smd: 1(-0.675,0.85)
  rect 0.66x0.203 smd: 2(-0.675,0.4) 3(-0.675,0) 4(-0.675,-0.4) 5(-0.675,-0.8) 7(0.675,-0.8) 8(0.675,-0.4) 9(0.675,0) 10(0.675,0.4) 11(0.675,0.8)
  rect 0.203x0.66 smd: 6(0,-0.825) 12(0,0.825)
XTLOSC4_3P2X2P5MM_SM
  rect 1.397x1.194 smd: 1(-1.1,-0.8) 2(1.1,-0.8) 3(1.1,0.8) 4(-1.1,0.8)

## Nets
GND: BH1.1 BH2.1 BH3.1 C1.2 C2.2 C3.2 C4.2 C5.2 C6.2 C7.2 C8.2 C9.2 C10.2 C11.2 C12.2 C14.2 C15.2 C16.2 C17.2 C18.2 C19.2 C20.2 C21.2 C22.2 C23.2 C24.2 C25.2 C26.2 C27.2 C28.2 C29.2 C30.2 C31.2 C32.2 C33.2 C34.2 C35.2 C36.2 C37.2 C38.2 C39.2 C40.2 C41.2 C42.2 C43.2 C45.2 C46.2 C48.2 C50.2 C51.1 C52.2 C53.2 C54.1 C56.2 C57.2 C58.2 C59.2 C61.2 C62.2 C63.2 C64.2 C65.2 C67.1 C68.2 C69.2 C71.2 C72.2 C73.2 C74.2 C75.2 C76.2 D5.1 D6.C(CATHODE) D7.1 D7.3 D7.5 D8.1 D9.1 D10.C(CATHODE) D11.1 D12.1 D13.C(CATHODE) D14.1 D15.3 D15.8 D16.1 D17.C(CATHODE) D18.1 D19.3 D19.8 D20.3 D20.8 D21.3 D21.8 D22.3 D22.8 D23.3 D23.8 D24.1 D25.1 D26.1 D27.1 FL1.2 FL2.2 FL3.2 FL4.2 FL5.2 FL6.2 FL7.2 FL8.2 J1.A1B12 J1.B1A12 J1.SH1 J1.SH2 J1.SH3 J1.SH4 J3.4 J3.SH1 J3.SH2 J4.4 J4.SH1 J4.SH2 J5.4 J5.SH1 J5.SH2 J6.6 J6.SH1 J6.SH2 J7.4 J7.SH1 J7.SH2 J8.10 J8.S1 J8.S2 J9.10 J9.S1 J9.S2 J12.2 P3.1 P3.2 P3.8 P3.11 P3.14 P3.20 P3.21 P3.25 P3.26 P3.28 P3.29 P3.30 P3.39 P3.40 P3.41 P3.42 P3.43 P3.44 P3.49 P3.50 P3.SH1 P3.SH2 P3.SH3 P3.SH4 P4.1 P4.2 P4.11 P4.12 P4.17 P4.18 P4.23 P4.24 P4.30 P4.33 P4.34 P4.40 P4.43 P4.49 P4.50 P4.SH1 P4.SH2 P4.SH3 P4.SH4 Q1.1 Q1.4(S2) Q2.2(SOURCE) R2.2 R6.2 R8.2 R9.2 R19.2 R28.2 R42.2 R53.2 R54.2 R57.2 R71.2 R72.2 R77.2 R81.2 R82.2 R85.2 R86.2 R87.2 R88.1 R97.1 R98.2 R109.2 U1.2 U1.25 U2.B1(GND) U3.B1 U3.C1 U3.C7 U3.D7 U3.F3 U3.G5 U4.C1 U5.B3 U5.C3 U5.D3 U6.3(COM_CATHODE) U7.2 U7.15 U8.9(VSS) U8.25 U9.3(COM_CATHODE) U10.2 U10.15 U11.1 U12.3(COM_CATHODE) U13.4 U13.6 U13.7 U14.2 U14.15 U15.6 U16.3 U17.3 Y1.2 Y1.4
VBUS: L1.2 R4.1 R5.1
VBUS_CONN: D5.2(A2) J1.A4B9 J1.B4A9(VBUS2) L1.1
VBUS_DETECT: R5.2 R6.1 U1.8
VDD_1V8: C6.1 C8.1 C74.1 C75.1 C76.1 L13.1 P3.27 R11.1 R12.1 R24.1 R36.1 R38.1 R39.1 R99.1 R107.1 U11.2 U15.1 U16.7(VDD) U17.7(VDD)
VDD_AUD_5V0: C19.1 C23.1 L2.1 U4.A1 U4.B1(VOUT2)
VDD_CAN1_3V3: C43.1 L8.2 U14.5
VDD_CAN1_5V0: C39.1 C40.1 L7.2 R50.1 U14.3 U14.10
VDD_CAN2_3V3: C34.1 L6.2 U10.5
VDD_CAN2_5V0: C32.1 C33.1 L5.2 R30.1 U10.3 U10.10
VDD_CAN3_3V3: C30.1 L4.2 U7.5
VDD_CAN3_5V0: C27.1 C28.1 L3.2 R23.1 U7.3 U7.10
VDD_CAN_5V0: C24.1 C25.1 FL1.1 FL3.1 FL4.1 U5.C2 U5.D1 U5.D2
VDD_CON_GPS_3V3: D19.4 D19.7 FL6.3(OUTPUT) J8.8
VDD_CON_GPS_5V0: D24.2(A2) FL7.3(OUTPUT) J8.1
VDD_CON_I2C_5V0: D18.2(A2) FL5.3(OUTPUT) J7.1
VDD_CON_PWM: D25.2(A2) FL8.3(OUTPUT) J9.1
VDD_CON_UART_5V0: D14.2(A2) FL2.3(OUTPUT) J6.1
VDD_SYS_3V3: C1.1 C3.1 C5.1 C35.1 C36.1 C41.1 C42.1 C44.1 C73.1 FL6.1 L4.1 L6.1 L8.1 L12.1 P3.31 P3.32 P3.33 P3.34 P3.35 P3.36 P3.37 P3.38 R32.1 R33.1 R34.1 R35.1 R37.1 R40.1 R55.1 R56.1 R69.1 R74.1 R102.1 SW1.1 SW1.2 U8.21 U8.23 U13.3 U13.11(VDDIO) U15.11
VDD_SYS_5V0: C2.1 C4.1 C7.1 C17.1 C18.1 C20.1 FL2.1 FL5.1 FL7.1 L3.1 L5.1 L7.1 P3.45 P3.46 P3.47 P3.48 R60.1 U4.A2 U4.B2 U5.A1 U5.A2(VIN2)
VDD_USB_3V3: C50.1 C53.1 R20.1 R62.1 R63.1 R64.1 R65.1 R68.1 R74.2 U1.5(VIO) U1.6
ADC_IN6: C45.1 P4.26 R57.1 R58.2
ADC_IN7: C29.1 P4.28 R19.1 R22.2
ARM_IO: D19.1 D19.10 J8.6 P4.21
AUD_ADCDAT: R91.2 U3.D2
AUD_BCLK: R90.2 U3.E1
AUD_DACDAT: R92.2 U3.D1
AUD_INT_3V3_N: U8.7 U15.10
AUD_INT_N: R14.2 R24.2 U15.2
AUD_LRCLK: R89.2 U3.D3
AUD_PWREN: R84.1 U8.16
AUD_SCL: R95.2 R96.2 U3.F1
AUD_SDA: R93.2 R94.2 U3.E2
BUZZER: D19.5 D19.6(NC4) J8.9 R52.2
CAN1_EN: R104.1 U8.1 U14.6
CAN1_ERR_N: U8.10 U14.8
CAN1_H: J5.2 R46.1 U12.1 U14.13
CAN1_L: J5.3 R47.1 U12.2 U14.12
CAN1_RX: P3.24 U14.4
CAN1_STB_N: U8.2 U14.14
CAN1_TX: P3.22 U14.1
CAN2_EN: R101.1 U8.3 U10.6
CAN2_ERR_N: U8.11 U10.8
CAN2_H: J4.2 R26.1 U9.1 U10.13
CAN2_L: J4.3 R27.1 U9.2 U10.12
CAN2_STB_N: U8.4 U10.14
CAN3_EN: R25.1 U7.6 U8.5
CAN3_ERR_N: U7.8 U8.12
CAN3_H: J3.2 R13.1 U6.1 U7.13
CAN3_L: J3.3 R15.1 U6.2 U7.12
CAN3_RX: U7.4 U15.7
CAN3_STB_N: U7.14 U8.6
CAN3_TX: U7.1 U15.8(YB3)
CAN_PWR_EN: R10.1 R87.1 U5.B4 U8.8
CCM2_CLKO2_FLEXIO1_IO27: P4.32 TP10.1(TP)
CCM_CLKO3_CAN3_TX: P4.36 U15.4
CCM_CLKO4_CAN3_RX: P4.38 U15.5
CON_CAN1_5V0: D16.2(A2) FL4.3(OUTPUT) J5.1
CON_CAN2_5V0: D12.2(A2) FL3.3(OUTPUT) J4.1
CON_CAN3_5V0: D8.2(A2) FL1.3(OUTPUT) J3.1
DEBUG_TCLK_SWCLK: P3.13 TP3.1(TP)
DEBUG_TDI: P3.19 TP5.1(TP)
DEBUG_TDO_TRACESWO: P3.17 TP6.1(TP)
DEBUG_TMS_SWDIO: P3.15 TP4.1(TP)
DMIC_CLK: R108.2 R110.2 U3.F4
DMIC_DATA: R105.2 R106.2 U3.E3
GPIO12_SPI8_PCS0: P4.35 R103.1
GPIO13_SPI8_SIN: P4.37 R49.2
GPIO14_SPI8_SOUT: P4.39 R44.1
GPIO15_SPI8_SCK: P4.41 R41.1
GPIO17_IMU_INT1: P4.45 R51.2
GPIO18_IMU_INT2: P4.47 R43.2
GPIO25_CAN2_TX: P4.20 U10.1
GPIO26_SPI8_PCS1: P4.10 R45.1
GPIO27_CAN2_RX: P4.22 U10.4
HP_FB: R97.2 U3.B4
HP_J_D: D26.2(A2) J12.5 R100.2
HP_J_L: C59.1 D9.2(A2) J12.4 L10.2
HP_J_R: C64.1 D11.2(A2) J12.3 L11.2
HP_JD: R99.2 R100.1 U3.G1
HP_L: C55.1 L10.1 R71.1 U3.B5
HP_MICIN: C57.1 D27.2(A2) J12.1 L9.2
HP_MICN: R61.1 U3.D4
HP_MICP: R73.1 U3.F6
HP_R: C66.1 L11.1 R82.1 U3.A5
I2C4_SCL: P3.18 R37.2 U8.19 U11.6
I2C4_SCL_1V8: R38.2 R96.1 U11.3
I2C4_SDA: P3.16 R35.2 U8.20 U11.5
I2C4_SDA_1V8: R39.2 R93.1 U11.4
I2C6_SCL: D20.1 D20.10 D21.4 D21.7 J7.2 J8.4 P4.9 R56.2
I2C6_SDA: D20.2 D20.9 D21.5 D21.6(NC4) J7.3 J8.5 P4.7 R55.2
I3C1_SCL: P3.6 TP1.1(TP)
I3C1_SDA: P3.4 TP2.1(TP)
I3C2A_SCL: P3.12 R11.2 R95.1
I3C2A_SDA: P3.10 R12.2 R94.1
IMU_INT1: R51.1 U13.16
IMU_INT2: R43.1 U13.12
IMU_PCS0: R103.2 U13.14
IMU_PCS1: R45.2 U13.5
IMU_SCK: R41.2 U13.8
IMU_SIN: R49.1 U13.10 U13.15
IMU_SOUT: R44.2 U13.9
IO_EXT_RST_N: R31.2 R33.2 U8.24
IO_WAKE_INT: P3.23 R32.2 U8.22
LED_B: R18.1 U8.15
LED_G: R16.1 U8.14
LED_R: R17.1 U8.13
MICBIAS: C16.1 R70.1 U3.A4
RX1_LED: D1.C(CATHODE) U1.15
RX2_LED: D3.C(CATHODE) U1.24
SAI2_RX_DATA0: P4.42 R91.1
SAI2_TX_BCLK: P4.46 R90.1
SAI2_TX_DATA0: P4.48 R92.1
SAI2_TX_SYNC: P4.44 R89.1
SPK_LN: R79.1 U3.B3
SPK_LP: R83.1 U3.A1
SPK_RN: R78.1 U3.C3
SPK_RP: R75.1 U3.B2
SPKOUTLN: C67.2 C70.2 J2.2 R79.2
SPKOUTLP: C70.1 C71.1 J2.1 R83.2
SPKOUTRN: C60.1 C62.1 J2.3 R78.2
SPKOUTRP: C54.2 C60.2 J2.4 R75.2
SW_LED_OUT: C44.2 D19.2 D19.9 J8.7 R54.1 SW1.3 SW1.4(B2) U8.17
TPM3_CH0: D22.1 D22.10 J9.2 P4.13
TPM3_CH1: D22.2 D22.9 J9.3 P4.4
TPM3_CH3: D22.4 D22.7 J9.4 P4.8
TPM4_CH0: D22.5 D22.6(NC4) J9.5 P4.15
TPM4_CH1: D23.1 D23.10 J9.6 P4.6
TPM5_CH0: D23.2 D23.9 J9.7 P4.19
TPM5_CH1: D23.4 D23.7 J9.8 P4.14
TPM6_CH1: D23.5 D23.6(NC4) J9.9 P4.16 S1.2
TX1_LED: D2.C(CATHODE) U1.14
TX2_LED: D4.C(CATHODE) U1.23
UART1_RXD: P3.5 R1.2
UART1_TXD/BT_MODE0: P3.3 R2.1 R3.2
UART2_RXD: P3.9 R76.2
UART2_TXD/BT_MODE1: P3.7 R77.1 R80.2
UART5_RX: D21.2 D21.9 J8.3 P4.5
UART5_TX: D21.1 D21.10 J8.2 P4.3
UART7_CTS_B: D15.4 D15.7 J6.4 P4.29
UART7_RTS_B: D15.5 D15.6(NC4) J6.5 P4.31
UART7_RX: D15.2 D15.9 J6.3 P4.27
UART7_TX: D15.1 D15.10 J6.2 P4.25
USB_CON_DM: J1.A7 J1.B7 U2.A1
USB_CON_DP: J1.A6 J1.B6 U2.A2
USB_DM: U1.4 U2.C1
USB_DP: U1.3 U2.C2
N20053038: R50.2 U14.9(WAKE)
N20053822: C38.1 R46.2 R47.2 R48.2
N20053962: R48.1 U14.11
N20058723: R30.2 U10.9(WAKE)
N20058772: R29.1 U10.11
N20058873: C31.1 R26.2 R27.2 R29.2
N20059561: R23.2 U7.9(WAKE)
N20059610: R21.1 U7.11
N20059703: C26.1 R13.2 R15.2 R21.2
N20060644: C72.1 U5.D4
N20061004: R86.1 U5.A3
N20088750: D1.A R63.2
N20088753: D2.A R62.2
N20089288: D3.A R65.2
N20089290: D4.A R64.2
N20094822: R28.1 U8.18
N20106794: Q2.1 R53.1 S1.1(NC)
N20106801: Q2.3 R52.1
N20159039: Q1.2 R36.2 R42.1
N20163544: Q1.3 R31.1 R34.2
N20163589: Q1.5 Q1.6 R102.2
N20172629: D6.A R10.2
N20174182: D10.A R25.2
N20174333: D17.A R104.2
N20178595: TP11.1(TP) U15.9
N20182715: D7.2 R18.2
N20182769: D7.4 R17.2
N20182794: D7.6 R16.2
N20208850: R20.2 R22.1
N20311259: R98.1 U15.12
N20341188: D13.A R101.2
N20361899: R68.2 U1.9
N20361925: C61.1 U1.16
N20362111: R1.1 U1.13
N20362592: R3.1 U1.12
N20362890: R80.1 U1.20
N20362893: R76.1 U1.21
N20368885: J1.A5 R8.1
N20368891: J1.B5 R9.1
N20378290: C10.1 R4.2 R69.2 U1.7
N20386284: C56.1 C58.1 C63.1 C65.1 C69.1 L13.2 U3.C6 U3.D6 U3.G2 U3.G3 U3.G4
N20386625: C21.1 C22.1 L2.2 U3.A2 U3.C2
N20386676: C68.1 L12.2 U3.A3
N20387022: C13.1 U3.B6
N20387024: C13.2 U3.B7
N20387049: C12.1 U3.A7
N20387076: C14.1 U3.A6
N20387210: R88.2 U3.F2
N20387346: C48.1 C52.1 R67.1 R70.2
N20387441: C15.1 U3.C5
N20387462: C47.2 R66.1 R67.2
N20387549: C49.2 L9.1 R66.2
N20387698: R84.2 R85.1 U4.C2
N20412531: C55.2 R72.1
N20412805: C66.2 R81.1
N20421509: C49.1 C51.2 R73.2
N20422040: C46.1 C47.1 R61.2
N20428202: C9.1 U3.G7 Y1.1
N20428207: R7.1 Y1.3
N20428656: C11.1 R7.2 U3.F7(XTO)
N20442778: R14.1 U3.E4
N20447268: C37.1 R40.2 U11.7(VREF2) U11.8
N20452575: TP7.1(TP) U3.C4
N20452580: TP8.1(TP) U3.F5
N20452893: TP9.1(TP) U3.G6
N20463767: TP12.1(TP) U15.3
N20496748: R106.1 U17.1
N20496751: R110.1 U17.6
N20496819: R109.1 U17.2
N20497965: R105.1 U16.1
N20497980: R108.1 U16.6
N20498681: R107.2 U16.2
N20566026: FL8.1 R59.2 R60.2
N20566511: R58.1 R59.1

Pads without a net: D20 4 5 6 7; J1 A8 B8; J12 6; U1 1 10 11 17 18 19 22; U3 D5 E5 E6 E7; U5 A4 B1 B2 C1 C4; U7 7; U10 7; U13 1 2 13; U14 7; U16 4 5; U17 4 5

## Via types
v1: diameter 0.457, hole 0.203, TOP to BOTTOM, 693 vias

## Routing (per net, layer and track width the routed paths; a pad name or vN(x,y) marks a point on that pad's centre or on a via; arc(x,y) is an arc through that point)
GND: length 202.3
  TOP w0.075: 18.15,64.4 18.15,64.03 ; 20.47,61.12 19.91,61.35 19.4,61.35 U3.F3
  TOP w0.1: 17.68,64.03 17.68,64.4
  TOP w0.145: 17.65,64 17.68,64.03
  TOP w0.15: 17.68,64.4 17.68,64.7 v1(17.5,64.88) ; U3.C7 17.65,64 ; 18.15,64.03 U3.D7 ; 18.15,64.4 18.15,64.58 18.32,64.75 v1(18.32,64.83)
  TOP w0.2: U11.1 24.07,33.01 ; U4.C1 10.95,58.37 ; 30.15,62 U2.B1
  TOP w0.25: U3.B1 17.15,60.45 v1(17.4,60.2) 17.65,60.45 U3.C1 ; U3.G5 20.07,62.6 v1(20.4,62.92)
  TOP w0.3: R2.2 29.31,70.41 v1(29.8,70.9) ; v1(12.3,29.27) 12.58,28.99 U13.4 ; v1(37.1,22.98) v1(38.1,22.98) ; v1(2.9,28) D15.3 D15.8 v1(5.05,28) ; v1(37.85,67.75) 37.85,67.17 J1.SH2 37,67.22 v1(37,67.75) ; D25.1 10.75,5.55 ; 10.75,5.55 v1(10,5.55) ; 10.75,5.55 v1(11.55,5.55) ; v1(20.47,61.12) 20.47,61.12 ; C38.2 v1(27.49,32.39) ; 10.95,58.37 v1(11.56,58.98) ; v1(30,29) U12.3 v1(30,30.5) ; v1(3.8,20.45) FL5.2 v1(5.5,20.45) ; v1(2.98,16) D20.3 v1(5.08,16) ; R57.2 v1(19.35,14.55) ; v1(3.3,17.9) 3.3,18.6 D18.1 3.3,18.7 v1(3.3,19.4) ; v1(37,57.2) 37,57.68 J1.SH1 37.85,57.73 v1(37.85,57.2) ; v1(9.18,5.78) FL8.2 v1(9.18,8.1) ; 7.85,34.6 v1(7.85,35.3) FL2.2 v1(7.85,37) ; 7.85,34.6 D14.1 ; 7.85,34.6 v1(7.85,33.9) ; 14.62,34.25 v1(15.3,34.25) ; 13.2,30.49 v1(13.2,31.1) ; 13.2,30.49 U13.7 ; 13.2,30.49 13.2,30.09 13.3,29.99 U13.6 ; v1(32.55,13) D21.3 D21.8 v1(30.45,13) ; v1(31.45,7.25) FL7.2 v1(31.45,9.1) ; v1(5.38,24.88) J6.6 v1(7.97,24.88) ; v1(30.4,17.95) 31.05,17.95 D19.8 31.15,17.95 31.85,17.95 D19.3 31.95,17.95 v1(32.65,17.95) ; R8.2 v1(28.35,60.85) ; v1(5.42,14.88) J7.4 v1(7.92,14.88) ; 24.07,33.01 v1(24.26,32.83) ; C31.2 v1(26.25,42.2) ; v1(33.6,57.2) 33.6,57.8 J1.SH3 32.8,57.66 v1(32.8,57.2) ; C45.2 v1(19.35,13.6) ; v1(28.65,21.75) 28.66,21.76 30.04,21.76 v1(30.05,21.75) ; v1(28.45,19.25) FL6.2 v1(30.25,19.25) ; v1(31.4,35.3) FL3.2 v1(31.4,37) ; U14.2 23.45,30.05 23.75,29.75 U14.15 ; v1(31.4,47.5) FL1.2 v1(31.4,45.8) ; v1(14.5,11.2) D22.3 D22.8 v1(14.5,13.3) ; v1(31.05,50.08) 30.67,50.08 U6.3 v1(30,51.5) 29.53,51.96 C26.2 ; v1(16.1,32.55) 16.5,32.95 Q1.1 ; v1(18.07,67.72) 18.93,66.87 C11.2 ; v1(24.5,11.2) D23.3 D23.8 v1(24.5,13.35) ; C21.2 v1(16.9,56.2) C22.2 v1(17.88,56.23) ; v1(27.48,63.9) U1.2 25.45,63.9 U1.25 ; v1(33.65,67.75) 33.65,67.15 J1.SH4 32.85,67.19 v1(32.85,67.75) ; 25.46,70.17 C6.2 ; U7.15 23.75,50.85 23.55,51.05 U7.2 ; v1(31.4,24.8) FL4.2 v1(31.4,26.5) ; R28.2 v1(8.5,39) ; v1(10.35,51.1) 10.35,50.32 C29.2 10.37,49.59 R19.2 ; 30.15,61.8 30.15,62 ; U8.25 13.75,40.5 U8.9 v1(13.75,43.05) ; U10.2 23.5,40.55 23.75,40.3 U10.15 ; v1(30,41) U9.3 v1(30,39.5) ; R9.2 v1(28.35,59.9) ; D9.1 v1(26.8,45.2) ; R53.2 v1(23.8,20.2)
  TOP w0.45: v1(25.12,6.45) J9.10 v1(25.12,3.75) ; v1(25.3,70.9) 25.46,70.17
  TOP w0.5: v1(35.85,42.12) J4.4 32.17,42.12 v1(32.02,41.98) ; D7.5 v1(1.65,53.85) ; v1(29.55,63.25) 29.29,63.51 D5.1 ; v1(30.75,10.5) D24.1 ; D7.3 v1(2.5,55.5) ; v1(30.15,61.65) 30.15,61.8 ; v1(35.23,31.62) J5.4 v1(32.77,31.62) ; v1(29.95,27.3) D16.1 ; v1(35.23,52.62) J3.4 v1(32.77,52.62) ; D8.1 31,48.6 31,49.05 v1(31.05,49.1) ; v1(32.48,21.12) J8.10 v1(35.23,21.12) ; D7.1 v1(3.35,53.85) ; D12.1 v1(29.9,37.85) ; v1(27.22,17.17) 27.22,18.18 Q2.2
  L2_GND1 w0.305: 36.33,66.05 J1.SH2 36.33,67.49 ; J1.SH4 34.54,67.49 ; J1.SH4 32,66.05 ; J1.SH4 34.54,66.05 ; J1.SH4 32,67.49 ; 36.33,57.41 J1.SH1 36.33,58.85 ; 32,57.41 J1.SH3 ; J1.SH3 32,58.85 ; J1.SH3 34.54,58.85 ; J1.SH3 34.54,57.41
  L3_SIG1 w0.305: 32,57.41 J1.SH3 ; J1.SH3 34.54,57.41 ; J1.SH3 32,58.85 ; J1.SH3 34.54,58.85 ; 36.33,58.85 J1.SH1 36.33,57.41 ; J1.SH4 34.54,66.05 ; J1.SH4 32,66.05 ; J1.SH4 32,67.49 ; J1.SH4 34.54,67.49 ; 36.33,67.49 J1.SH2 36.33,66.05
  L5_GND2 w0.305: 32,57.41 J1.SH3 ; J1.SH3 34.54,58.85 ; J1.SH3 32,58.85 ; J1.SH3 34.54,57.41 ; 32,66.05 J1.SH4 ; J1.SH4 34.54,66.05 ; J1.SH4 32,67.49 ; J1.SH4 34.54,67.49 ; 36.33,57.41 J1.SH1 36.33,58.85 ; 36.33,66.05 J1.SH2 36.33,67.49
  BOTTOM w0.2: P4.18 v1(9.15,52.85) ; v1(13.1,52.65) 13.2,52.65 13.55,52.3 P4.40 ; P4.11 v1(7.95,53.65) ; v1(27.3,73.6) 27,73.6 26.9,73.5 P3.14 ; P4.12 v1(7.95,52.85) ; P4.33 v1(12.35,55.35) ; P3.21 v1(25.3,70.9) ; P4.49 v1(15.55,55.35) ; P4.23 v1(10.35,53.75) ; P3.20 25.7,72.3 25.9,72.1 v1(26.15,72.1) ; P4.30 v1(11.55,51.1) ; P3.8 v1(28.1,73.6) ; P4.43 v1(14.35,55.35) ; P4.34 v1(12.35,51.1) ; P4.17 v1(9.15,53.65) ; P4.24 v1(10.35,51.1) ; P4.SH3 v1(16.02,53.9) ; P3.11 v1(27.3,69.3)
  BOTTOM w0.3: v1(11.45,9.7) 11.45,8.8 ; R86.2 v1(27.35,58.75) ; 12.11,8.09 v1(12.88,8.09) ; C74.2 v1(13.05,46.75) ; v1(14.5,11.2) 13.78,10.47 R109.2 ; v1(27.32,9.7) 27.32,8.82 ; 10.77,8.1 v1(9.18,8.1) ; v1(17.4,60.2) 17.66,60.19 18.25,60.74 C68.2 ; C72.2 v1(28.25,56.65) ; C50.2 v1(25.45,65.38) 25.84,65.28 ; 29.28,62.6 29.28,62.98 v1(29.55,63.25) ; 27.96,8.09 v1(28.75,8.09) ; v1(38,40) 37.98,40.02 D27.1 ; R97.1 37.5,50.3 v1(37.5,49.5) ; U15.6 v1(14.75,51.2) ; v1(25.9,8.05) 26.6,8.05 ; R87.2 v1(28.25,57.65)
  vias: v1(1,29.5) v1(1,27.5) v1(1,25.5) v1(1,23.5) v1(1,21.5) v1(1,19.5) v1(1,17.5) v1(1,15.5) v1(1,13.5) v1(1,11.5) v1(1.3,47.7) v1(2,30.5) v1(2.3,47.1) v1(3.75,30.5) v1(4.01,65.46) v1(4.01,62.42) v1(3.99,61.53) v1(4,58.49) v1(4.45,68.52) v1(4.9,70.65) v1(5.15,53.8) v1(5.15,52.7) v1(5.55,48.3) v1(5.9,65.44) v1(6,52.7) v1(6.8,38.75) v1(6.8,37.9) v1(7.65,70.51) v1(7.66,65.44) v1(8.5,1) v1(8.76,63.97) v1(9.04,58.41) v1(9.03,32.98) v1(9.03,23.02) v1(9.03,20.48) v1(8.95,17.95) v1(9.03,13.03) v1(9.65,70.65) v1(9.89,64.86) v1(9.97,61.64) v1(10.03,32.98) v1(10.03,23.02) v1(10.03,20.48) v1(10.03,13.03) v1(10.29,60.76) v1(10.4,16.2) v1(10.5,1) v1(10.77,65.91) v1(11.03,32.98) v1(11.03,23.02) v1(11.03,20.48) v1(11.03,13.03) v1(11.33,11.45) v1(11.4,70.65) v1(11.64,65.81) v1(12.03,2.9) v1(12.03,1.9) v1(12.03,0.9) v1(12.16,58.21) v1(12.5,19.5) v1(12.75,41) v1(12.75,39.5) v1(12.75,35.49) v1(13.2,70.65) v1(13.3,58.69) v1(13.39,62.42) v1(13.46,60.47) v1(13.5,18.5) v1(14.05,26.05) v1(14.18,65.15) v1(14.18,64.15) v1(14.25,41) v1(14.25,39.5) v1(14.5,1) v1(14.75,46.74) v1(14.75,35.49) v1(15,19.5) v1(14.97,9.25) v1(15.62,57.05) v1(15.75,46.74) v1(15.88,69.33) v1(15.97,42.67) v1(16.5,1) v1(16.7,52) v1(16.7,51.2) v1(16.95,9.75) v1(17,18.5) v1(17.46,28.65) v1(17.9,32.59) v1(18,18.5) v1(18.07,65.6) v1(18.45,24.1) v1(18.5,1) v1(18.55,28.05) v1(18.55,26.65) v1(19.3,73.6) v1(19.3,72.05) v1(19.3,70.9) v1(19.3,69.4) v1(19.6,51.2) v1(19.6,40.7) v1(19.6,30.2) v1(19.68,67.64) v1(20.5,19.5) v1(20.5,1) v1(20.55,51.2) v1(20.55,48.09) v1(20.55,40.7) v1(20.55,37.59) v1(20.55,30.2) v1(20.55,27.09) v1(20.98,56.82) v1(21.15,41.85) v1(21.3,73.6) v1(21.3,72.1) v1(21.3,70.9) v1(21.3,69.4) v1(22.05,17.49) v1(22.05,9.7) v1(22.34,68.58) v1(22.5,1) v1(22.77,42.85) v1(22.75,19.75) v1(22.9,16.4) v1(23.25,51.5) v1(23.25,50.5) v1(23.25,49) v1(23.25,48) v1(23.25,41) v1(23.25,40) v1(23.25,38.5) v1(23.25,37.5) v1(23.25,30.5) v1(23.25,29.5) v1(23.25,28) v1(23.25,27) v1(23.34,60.45) v1(23.41,61.91) v1(23.95,65.38) v1(23.95,63.88) v1(23.9,43.88) v1(24.1,73.6) v1(24.1,72.1) v1(24.1,70.9) v1(24.15,45.9) v1(24.25,51.5) v1(24.25,50.5) v1(24.25,49) v1(24.25,48) v1(24.25,41) v1(24.25,40) v1(24.25,38.5) v1(24.25,37.5) v1(24.25,30.5) v1(24.25,29.5) v1(24.25,28) v1(24.25,27) v1(24.2,16.4) v1(24.18,9.22) v1(24.5,1) v1(25.15,61.6) v1(25.15,60.75) v1(25.25,19.5) v1(25.45,63.88) v1(25.9,54.55) v1(25.9,53.7) v1(26,61.6) v1(26,60.75) v1(26.75,54.55) v1(26.75,53.7) v1(26.98,2.9) v1(26.98,1.9) v1(26.98,0.9) v1(27.2,11.45) v1(27.7,50.75) v1(27.7,29.75) v1(27.83,66.64) v1(28.23,13.7) v1(28.5,1) v1(29.4,42.85) v1(29.55,47.16) v1(29.8,73.6) v1(29.8,72.1) v1(29.8,69.45) v1(30.4,66.98) v1(31,73.5) v1(31,72) v1(31,70.5) v1(31.18,68.72) v1(31.25,63.25) v1(31.25,61.65) v1(31.4,58.85) v1(31.4,58.1) v1(31.48,15.22) v1(31.65,66.35) v1(31.65,65.65) v1(34.35,63.2) v1(34.35,61.7) v1(34.91,56.25) v1(34.91,35) v1(34.91,24.5) v1(34.98,45.45) v1(35.6,64.7) v1(36.1,22.98) v1(36.1,8.03) v1(36.2,54.48) v1(36.25,47) v1(36.2,43.98) v1(36.2,36.52) v1(36.2,33.48) v1(36.2,26.02) v1(37.1,8.03) v1(37.2,54.48) v1(37.25,47) v1(37.2,43.98) v1(37.2,36.52) v1(37.2,33.48) v1(37.2,26.02) v1(38,53) v1(38,50.5) v1(38,38) v1(38,31.5) v1(38,29.5) v1(38,27.5) v1(38,21.5) v1(38,19.5) v1(38,17.5) v1(38,15.5) v1(38,13.5) v1(38,11.5) v1(38,9.5) v1(38.1,8.03) v1(38.25,63.5) v1(38.25,61.5) v1(38.25,59.5) v1(38.2,54.48) v1(38.23,48.48) v1(38.25,47) v1(38.2,43.98) v1(38.23,42.45) v1(38.2,36.52) v1(38.2,33.48) v1(38.2,26.02) v1(38.3,69.25) v1(38.3,65.35)
VBUS: length 2
  TOP w0.6: R5.1 R4.1 28.75,66.94 28.75,66.37 28.76,66.36 28.76,66.3 28.81,66.26 28.81,66.15 28.86,66.1 L1.2
VBUS_CONN:
  vias: v1(31.1,64.85) v1(31.05,60.05) v1(31.75,64.85) v1(31.75,60.05)
VBUS_DETECT: length 6.3
  TOP w0.145: U1.8 25.45,67.25 25.7,67.5 26.77,67.5 27.57,68.3 28.15,68.3 28.37,68.52 28.96,68.52 29.48,68.01 R5.2 R6.1
VDD_1V8: length 63.6
  TOP w0.145: v1(25.3,33.24) 25.29,33.25 ; 12.93,47.76 R24.1 ; 24.65,33.9 24.52,34.02 U11.2
  TOP w0.25: v1(25.3,33.24) R39.1 ; 25.29,33.25 24.65,33.9
  TOP w0.45: v1(24.1,68.8) 23.88,68.58 C8.1 ; C6.1 24.4,70.09 v1(24.1,69.4)
  TOP w0.5: v1(20.2,54.88) 20.2,54.65 19.93,54.38 R12.1 R11.1 17.97,53.98 17.2,53.21 17.2,52.5 17.55,52.15 17.55,50.45 15.82,50.45 13.75,48.38 v1(13.75,47.76)
  TOP w0.6: v1(13.75,47.76) 12.93,47.76 ; 17.55,50.45 17.55,49.35 18.05,48.85 v1(18.05,48.25) v1(18.05,47.25)
  L4_SIG2 w0.6: v1(10.32,11.45) 10.32,11.08 10.93,10.47 25.21,10.47 v1(26.18,11.45) 26.18,11.39 26.9,10.68 28.93,10.68 v1(29.62,11.38) v1(30.35,11.38) ; v1(24.1,69.4) v1(24.1,68.8) 24.1,68.55 23.8,68.25 23.8,66.47 23.19,65.86 23.19,62.69 22.02,61.52 v1(22.02,56.93) 22.02,56.9 20.2,55.08 v1(20.2,54.88)
  BOTTOM w0.145: v1(29.62,11.38) 29.55,11.3 R107.1
  BOTTOM w0.3: v1(13.75,47.76) 13.75,48.7 13.95,48.9 U15.1
  BOTTOM w0.5: v1(26.18,11.45) 26.18,10.44 U16.7 ; U17.7 10.32,10.45 v1(10.32,11.45)
  vias: v1(18.91,34.6)
VDD_CAN1_3V3: length 2.8
  TOP w0.3: C43.1 22.24,28.11 U14.5
  TOP w0.5: L8.2 19.72,28.11 C43.1
VDD_CAN1_5V0: length 12.2
  TOP w0.3: U14.3 21.2,29.4 21.02,29.23 v1(20.55,29.23) 20.52,29.19 C39.1 ; U14.10 25.95,28.1 v1(26.2,27.85) 26.75,27.3 R50.1
  TOP w0.5: C39.1 18.67,29.19 L7.2
  BOTTOM w0.5: v1(20.55,29.23) 20.77,29.45 22.05,29.45 22.75,28.75 25.3,28.75 v1(26.2,27.85)
VDD_CAN2_3V3: length 2.8
  TOP w0.3: C34.1 22.24,38.61 U10.5
  TOP w0.5: L6.2 19.72,38.61 C34.1
VDD_CAN2_5V0: length 13
  TOP w0.3: U10.3 21.2,39.9 21.02,39.73 v1(20.55,39.73) 20.52,39.69 C32.1 ; v1(26.75,37.76) 26.75,37.8 25.95,38.6 U10.10
  TOP w0.5: L5.2 18.67,39.69 C32.1
  BOTTOM w0.5: v1(26.75,37.76) 26.02,37.76 24.52,39.25 22.75,39.25 22.05,39.95 20.77,39.95 v1(20.55,39.73)
VDD_CAN3_3V3: length 2.8
  TOP w0.3: U7.5 22.24,49.11 C30.1
  TOP w0.5: C30.1 19.72,49.11 L4.2
VDD_CAN3_5V0: length 16.3
  TOP w0.3: U7.3 21.2,50.4 21.02,50.23 v1(20.55,50.23) 20.52,50.19 C27.1 ; U7.10 25.95,49.1 26.43,48.62 26.81,48.62 R23.1 27.51,47.88 26.85,47.23 25.57,47.23 25.2,46.85 v1(23.62,46.85)
  TOP w0.5: C27.1 18.67,50.19 L3.2
  BOTTOM w0.5: v1(23.62,46.85) 23.4,46.85 22.35,47.9 22.35,48.58 21.85,49.08 20.93,49.08 20.55,49.45 v1(20.55,50.23)
VDD_CAN_5V0:
  vias: v1(21.95,54.6) v1(21.95,53.75) v1(22.8,54.6) v1(22.8,53.75) v1(30.15,47.6) v1(30.38,35.27) v1(30.4,34.35) v1(30.38,24.77) v1(30.4,23.85) v1(30.75,47.35)
